# Altium PCB 台灯.PcbDoc
Units mm, origin at the board's own origin, x right, y up, seen from the top; angles counter-clockwise.
Board outline 43.81 x 25.27 mm, 2 copper layers (Top Layer, Bottom Layer); 19 components, 16 nets, 72 pads, 12 vias.
Unrouted connection lines stored in the file: 1.
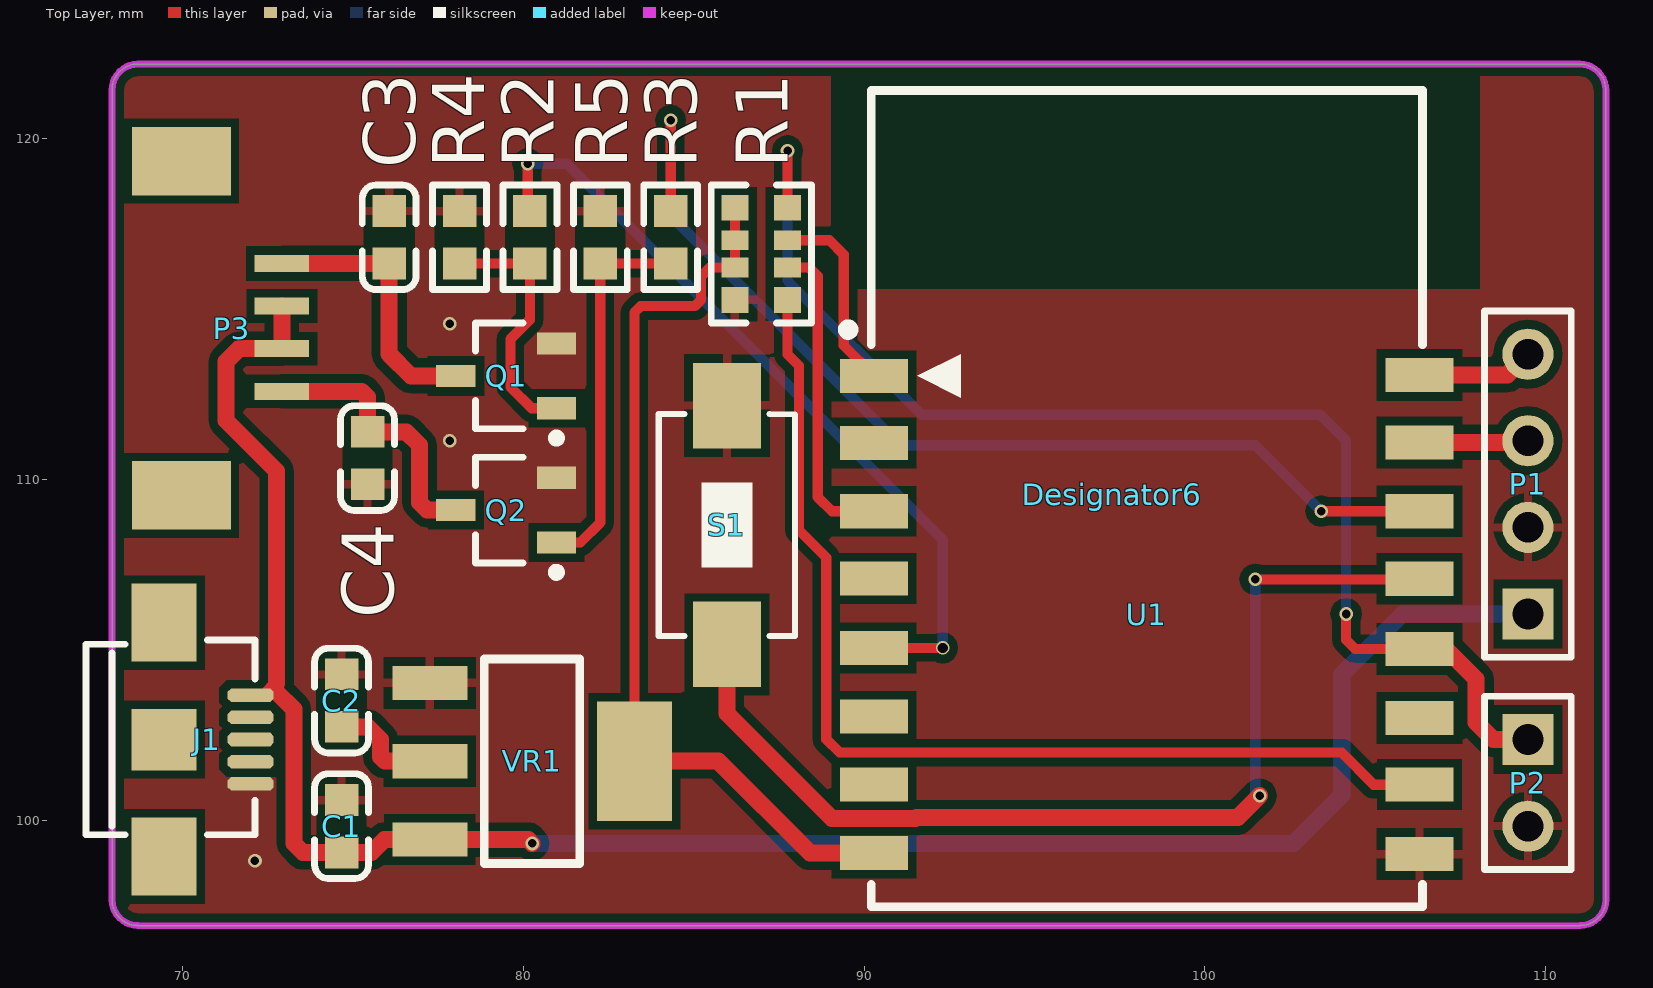
[diagram p0: Top Layer view]
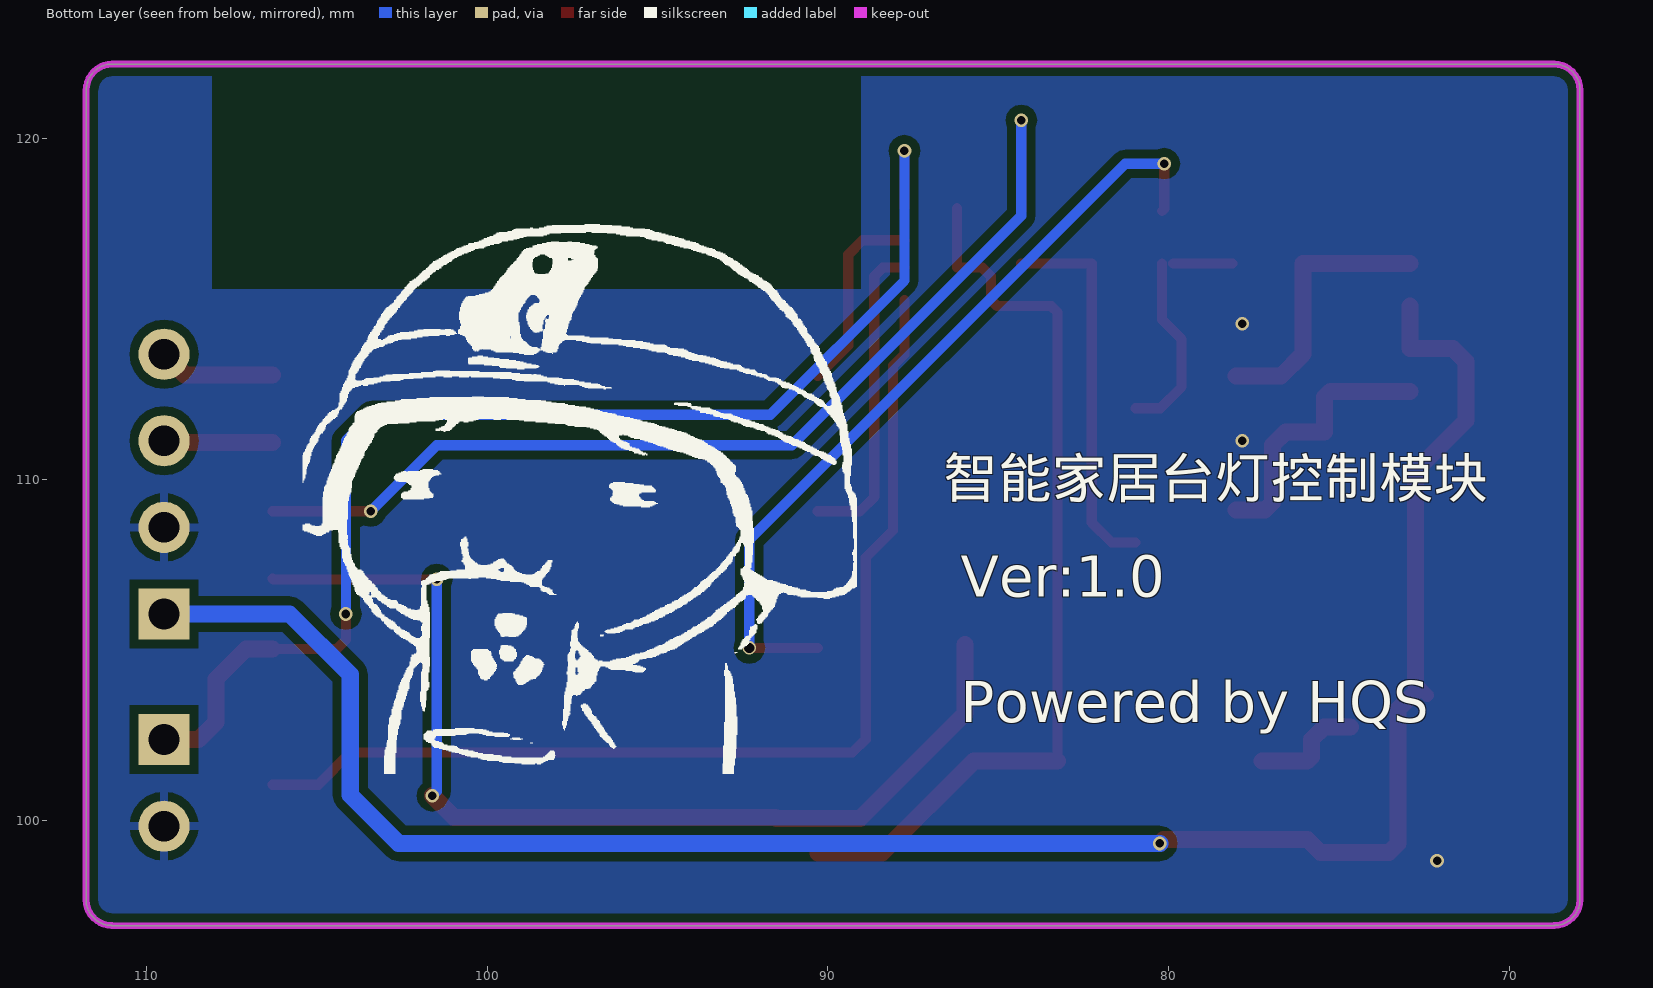
[diagram p1: Bottom Layer view, seen from below]
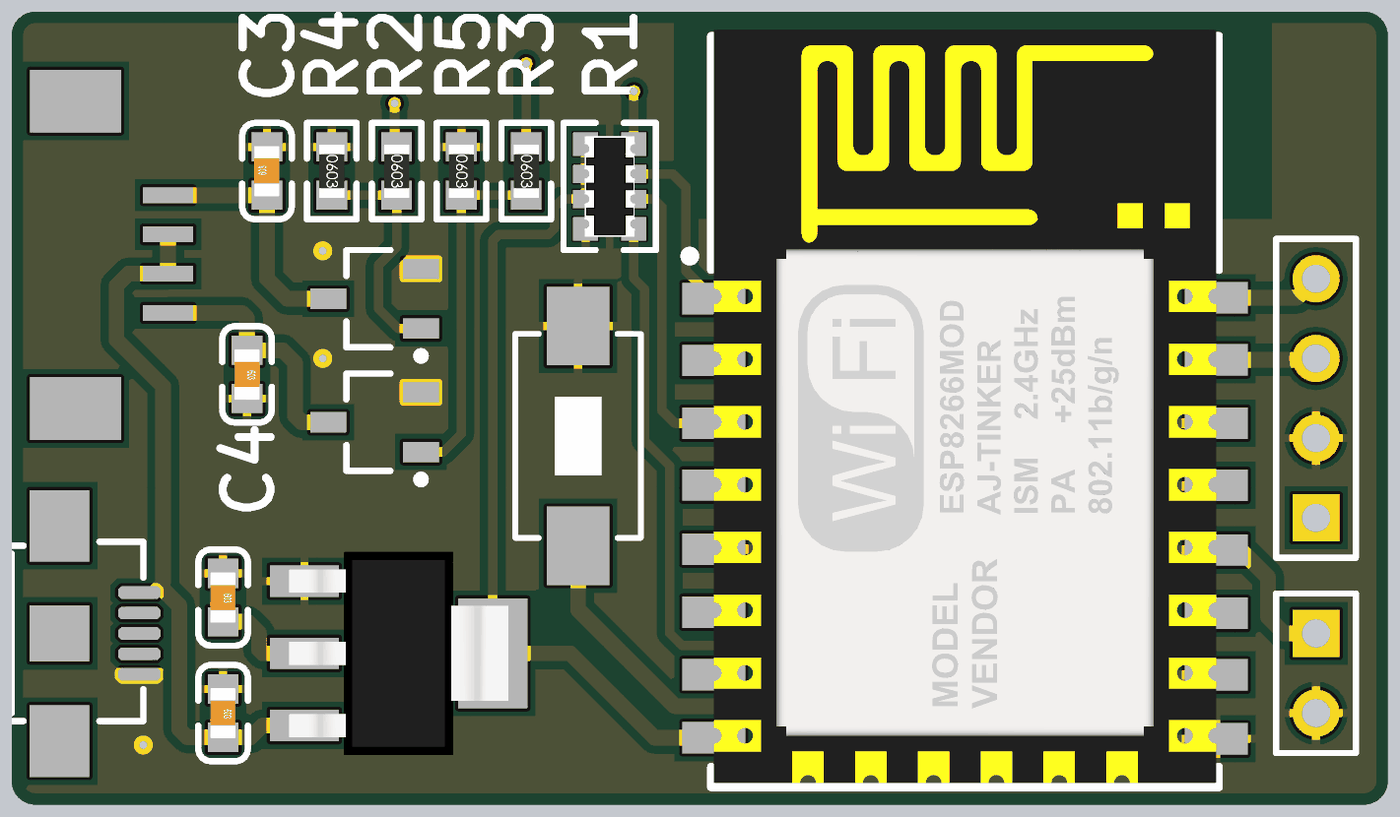
[diagram p2: 3D render of the assembled board from above, using the file's embedded part models]

## Layer stack, top to bottom
Top Solder: solder mask 0.0102, Solder Resist, Dk 3.5
Top Layer: signal copper 0.0356
Dielectric 1: dielectric 0.32, FR-4, Dk 4.8
Bottom Layer: signal copper 0.0356
Bottom Solder: solder mask 0.0102, Solder Resist, Dk 3.5

## Board outline
67.945,97.663 67.945,121.42 cw(c68.699,121.42) 68.699,122.174 111,122.174 cw(c111,121.42) 111.754,121.42 111.76,121.42 111.76,97.663 cw(c111.006,97.663) 111.006,96.909 111.006,96.901 68.699,96.901 68.699,96.909 cw(c68.699,97.663)

## Design rules (kind name [scope] priority, off if disabled: settings)
Clearance [All] p1: gap=0.254 ignorepadtopadclearanceinfootprint=FALSE except(0: Arc-Hole Track-Hole SMDPad-Hole THPad-Hole Via-Hole Fill-Hole Poly-Hole Region-Hole Text-Hole)
PlaneConnect PlaneConnect_1 [All] p1: planeconnectstyle=Relief reliefexpansion=0.508 reliefentries=4 reliefconductorwidth=0.254 reliefairgap=0.254
PolygonConnect PolygonConnect_1 [IsVia] p1: connectstyle=Direct reliefconductorwidth=0.254 reliefentries=4 polygonreliefangle="90 Angle" airgapwidth=0.254
PolygonConnect PolygonConnect_GND [HasFootprint('USB_MICRO')] p2: connectstyle=Direct reliefconductorwidth=0.254 reliefentries=4 polygonreliefangle="90 Angle" airgapwidth=0.254
PolygonConnect PolygonConnect_GND_1 [HasFootprint('LC-SOT-23-3L')] p3: connectstyle=Direct reliefconductorwidth=0.254 reliefentries=4 polygonreliefangle="90 Angle" airgapwidth=0.254
PolygonConnect [All] p4: connectstyle=Relief reliefconductorwidth=0.254 reliefentries=4 polygonreliefangle="90 Angle" airgapwidth=0.254
RoutingVias [All] p1: holewidth=0.711 width=1.27 viastyle="Through Hole" minholewidth=0.711 minwidth=1.27 maxholewidth=0.711 maxwidth=1.27
SolderMaskExpansion [All] p1: expansion=0.102
Width [All] p1: maxlimit=1 minlimit=0.254 preferedwidth=0.254 minimp=50.000000 maximp=50.000000 favimp=50.000000
29 further rules are at their usual default settings.

## Classes and differential pairs
component class Sheet1: C1 C2 C3 C4 J1 P1 P2 P3 Q1 Q2 R1 R2 R3 R4 R5 S1 U1 VR1

## Components (designator, comment, footprint, x,y, rotation, side; value= is the part's Value field where it differs from the comment)
C1 "22uF (226) 20% 6.3V" LC-0603_C 74.676,99.822 r270 top
C2 "22uF (226) 20% 6.3V" LC-0603_C 74.676,103.505 r270 top
C3 "22uF (226) 20% 6.3V" LC-0603_C 76.073,117.094 r90 top
C4 "22uF (226) 20% 6.3V" LC-0603_C 75.438,110.617 r270 top
Designator6 "Comment" PCBComponent_1 97.282,109.563 r0 top
J1 "USB_M" USB_MICRO 69.469,102.362 r270 top locked
P1 "Debug" HDR1X4 109.474,106.045 r90 top
P2 "Boot" HDR1X2 109.474,102.362 r270 top
P3 "LED连接器" 1.25连接器 69.977,114.427 r270 top locked
Q1 "AO3400A N道沟 X0YV1T SOT-23" LC-SOT-23-3L 79.502,113.03 r0 top
Q2 "AO3400A N道沟 X0YV1T SOT-23" LC-SOT-23-3L 79.502,109.093 r0 top
R1 "10KΩ (103) ±5%" LC-0603_Rx4 86.987,116.605 r90 top
R2 "1KΩ (1001) ±1%" LC-0603_R 80.2,117.094 r270 top
R3 "1KΩ (1001) ±1%" LC-0603_R 84.328,117.094 r270 top
R4 "1.5KΩ (1501) ±1%" LC-0603_R 78.137,117.094 r270 top
R5 "1.5KΩ (1501) ±1%" LC-0603_R 82.264,117.094 r270 top
S1 "SW-PB" SW_PB2_A1 85.979,108.712 r180 top locked
U1 "ESP-12" ESP_12 90.297,113.03 r0 top locked
VR1 "AMS1117-3.3" LC-SOT-223 80.264,101.727 r180 top

## Footprints (in the part's own frame and the unit in brackets; to place one, negate y for a bottom-side part, rotate by r counter-clockwise, add the part's x,y. Pads: shape width x height; smd on the part's side, far side on the other; paste and mask are expansions set on the pad)
1.25连接器 [mm]
  rect 2x2.9 smd: 0(-4.9,0) 0(4.9,0)
  rect 0.5x1.6 smd: 1(-1.9,2.95) 2(-0.65,2.95) 3(0.6,2.95) 4(1.85,2.95)
ESP_12 [mm]
  rect 2x1 smd: 1(0,0) 2(0,-1.97) 3(0,-3.97) 4(0,-5.94) 5(0,-7.98) 6(0,-9.99) 7(0,-11.98) 8(0,-13.99) 9(16,-14.03) 10(16,-11.99) 11(16,-10.03) 12(16,-8.01) 13(16,-5.95) 14(16,-3.97) 15(16,-1.95) 16(16,0.03)
  silkscreen extent -0.91,-15.57 16.08,8.37, body extent 0,-15.43 16.01,8.57, height 2.65
HDR1X2 [mm] "Connector; Header; 2 Position"
  rect 1.5x1.5 hole 0.9: 1(0,0)
  round 1.5 hole 0.9: 2(2.54,0)
  silkscreen extent -1.27,-1.27 3.81,1.27
HDR1X4 [mm] "Connector; Header; 4 Position"
  rect 1.5x1.5 hole 0.9: 1(0,0)
  round 1.5 hole 0.9: 2(2.54,0) 3(5.08,0) 4(7.62,0)
  silkscreen extent -1.27,-1.27 8.89,1.27
LC-0603_C [mm]
  rect 0.93x0.98 smd: 1(-0.77,0) 2(0.77,0)
  silkscreen extent -1.53,-0.79 1.54,0.79, body extent -0.8,-0.4 0.8,0.4, height 0.3
LC-0603_R [mm]
  rect 0.93x0.98 smd: 1(-0.77,0) 2(0.77,0)
  silkscreen extent -1.53,-0.79 1.54,0.79, body extent -0.85,-0.4 0.85,0.4, height 0.56
LC-0603_Rx4 [mm]
  rect 0.75x0.8 smd mask+0.051: 1(-1.35,-0.77) 4(1.35,-0.77) 5(1.35,0.77) 8(-1.35,0.77)
  rect 0.58x0.8 smd mask+0.051: 2(-0.4,-0.77) 3(0.4,-0.77) 6(0.4,0.77) 7(-0.4,0.77)
  silkscreen extent -2.02,-1.47 2.02,1.47, body extent -1.6,-0.8 1.6,0.8, height 0.55
LC-SOT-23-3L [mm] "http://www.aosmd.com/res/packaging_information/SOT-23-3L.pdf"
  rect 1.15x0.65 smd: 1(1.475,-0.95) 2(1.475,0.95) 3(-1.475,0)
  silkscreen extent -0.9,-1.95 1.6,1.55, body extent -0.9,-1.55 0.9,1.55, height 1.25
LC-SOT-223 [mm]
  rect 2.2x1 smd: 1(3,-2.3) 2(3,0) 3(3,2.3)
  rect 2.2x3.5 smd: 2(-3,0)
  silkscreen extent -1.4,-3 1.4,3, body extent -3.49,-3.24 3.49,3.24, height 1.64
PCBComponent_1 [mm]
SW_PB2_A1 [mm]
  rect 2x2.5 smd: 1(0,3.556) 2(0,-3.444)
  silkscreen extent -2,-3.19 2,3.31, body extent -2.03,-3.18 2.03,3.3, height 1.2
USB_MICRO [mm] "USB方孔"
  oct 0.4x1.35 smd: 1(-1.3,2.54) 2(-0.65,2.54) 3(0,2.54) 4(0.65,2.54) 5(1.3,2.54)
  rect 2.286x1.9 smd: 6(3.429,0) 7(-3.429,0)
  rect 1.8x1.9 smd: 8(0,0)
  silkscreen extent -2.92,-2.29 2.79,2.67

## Part data
C1 C2 C3 C4: library part "0603 22uF (226) 20% 6.3V", "贴片电容", Package=0603, SuppliersPartNumber=C59461, ComponentLink1Description=供应, ComponentLink1URL=http://www.szlcsc.com/product/details_60514.html, Supplier=LC
J1: "MicroUSB接口"
P1: library part "Header 4", "Header, 4-Pin", LatestRevisionDate=17-Jul-2002, LatestRevisionNote="Re-released for DXP Platform.", Publisher="Altium Limited"
P2: library part "Header 2", "Header, 2-Pin", LatestRevisionDate=17-Jul-2002, LatestRevisionNote="Re-released for DXP Platform.", Publisher="Altium Limited"
P3: library part 1.25mm连接器
Q1 Q2: "MOS(场效应管)", Package=SOT-23, SuppliersPartNumber=C20917, ComponentLink1Description=供应, ComponentLink1URL=http://www.szlcsc.com/product/details_21629.html, Supplier=LC
R1: library part "0603*4  10KΩ (103) 5%", "贴片排阻", Package=0603*4, SuppliersPartNumber=C29718, ComponentLink1Description=供应, ComponentLink1URL=http://www.szlcsc.com/product/details_30472.html, Supplier=LC
R2 R3: library part "0603 1KΩ (1001) 1%", "贴片电阻", Package=0603, SuppliersPartNumber=C21190, ComponentLink1Description=供应, ComponentLink1URL=http://www.szlcsc.com/product/details_21904.html, Supplier=LC
R4 R5: library part "0603 1.5KΩ (1501) 1%", "贴片电阻", Package=0603, SuppliersPartNumber=C22843, ComponentLink1Description=供应, ComponentLink1URL=http://www.szlcsc.com/product/details_23570.html, Supplier=LC
S1: "微动开关", LatestRevisionDate=17-Jul-2002, LatestRevisionNote="Re-released for DXP Platform.", PackageReference=SPST-2, Published=24-Mar-1999, Publisher="Altium Limited"
VR1: library part "SOT-223 AMS1117-3.3", "低压差线性稳压(LDO)", Package=SOT-223, SuppliersPartNumber=C6186, ComponentLink1Description=供应, ComponentLink1URL=http://www.szlcsc.com/product/details_6652.html, Supplier=LC

## Via types
v1: diameter 0.4, hole 0.25, Top Layer to Bottom Layer, 11 vias
v2: diameter 0.4, hole 0.3, Top Layer to Bottom Layer, 1 vias

## Nets (pads, with @x,y where several pads share a name; then routed paths per layer and width w, separated by ;. In a path a pad name is that pad's centre, name@x,y a point inside that pad or via, vN(x,y) a via of type N, cw(c..) or ccw(c..) an arc to the next point about the centre after c; other vN are vias at no path point)
Boot: P2.1 R1.4 U1.12 | length 36.9
  Top Layer w0.3: R1.4 v1(87.757,119.634) ; v1(104.14,106.045) 104.14,105.283 104.403,105.02 U1.12
  Top Layer w0.5: U1.12 107.07,105.02 107.95,104.14 107.95,102.87 108.458,102.362 P2.1
  Bottom Layer w0.3: v1(87.757,119.634) 87.757,115.824 91.694,111.887 103.378,111.887 104.14,111.125 v1(104.14,106.045)
Button_io: S1.1 U1.13 | length 30.4
  Top Layer w0.3: v1(101.473,107.061) 106.278,107.061 U1.13
  Top Layer w0.5: S1.1 85.979,103.124 89.057,100.046 91.506,100.046 91.536,100.076 100.965,100.076 v1(101.604,100.715)
  Bottom Layer w0.3: v1(101.473,107.061) 101.473,100.846 v1(101.604,100.715)
GND: C1.1 C2.1 C3.2 C4.2 J1.5 P1.2 P2.2 Q1.2 Q2.2 R1.8 R4.1 R5.1 S1.2 U1.9 VR1.1
  other v1: 72.136,98.806 77.851,111.125 77.851,114.554
Io15: R1.1 U1.10 | length 31.3
  Top Layer w0.3: R1.1 87.757,113.665 88.092,113.33 88.092,108.504 88.893,107.703 88.893,102.373 89.285,101.981 104.013,101.981 104.954,101.04 U1.10
LED_Warm: R2.1 U1.5 | length 23.3
  Top Layer w0.3: v1(80.137,119.253) 80.137,117.928 R2.1 ; U1.5 v2(92.308,105.05)
  Bottom Layer w0.3: v1(80.137,119.253) 81.28,119.253 92.308,108.225 v2(92.308,105.05)
LED_White: R3.1 U1.14 | length 31
  Top Layer w0.3: R3.1 v1(84.328,120.523) ; v1(103.411,109.06) U1.14
  Bottom Layer w0.3: v1(84.328,120.523) 84.328,117.729 91.059,110.998 101.473,110.998 v1(103.411,109.06)
NetQ1_1: Q1.1 R2.2 R4.2 | length 7.2
  Top Layer w0.3: R4.2 R2.2@79.883,116.324 ; R2.2 80.2,114.675 79.629,114.103 79.629,112.704 80.253,112.08 Q1.1
NetQ2_1: Q2.1 R3.2 R5.2 | length 11.2
  Top Layer w0.3: Q2.1 81.681,108.143 82.264,108.726 R5.2 R3.2
NetR1_3: R1.2 U1.3 | length 9.3
  Top Layer w0.3: R1.2 88.392,116.205 88.646,115.951 88.646,109.474 89.06,109.06 U1.3
NetR1_4: R1.3 U1.1 | length 5.7
  Top Layer w0.3: R1.3 88.989,117.005 89.408,116.586 89.408,113.919 U1.1
RX: P1.3 U1.15 | length 3.2
  Top Layer w0.5: U1.15 109.429,111.08 P1.3
TX: P1.4 U1.16 | length 3.4
  Top Layer w0.5: U1.16 108.869,113.06 P1.4
VCC: C2.2 R1.5 R1.6 R1.7 U1.8 VR1.2 | length 30.3
  Top Layer w0.3: VR1.2@83.264,101.727 83.264,114.887 83.454,115.077 85.039,115.077 85.222,115.26 85.222,115.951 85.476,116.205 R1.7 R1.6 R1.5
  Top Layer w0.5: C2.2 75.446,102.735 75.819,102.362 75.819,101.854 75.946,101.727 VR1.2@77.264,101.727 ; VR1.2@83.264,101.727 85.725,101.727 88.412,99.04 U1.8
Vcc_5v: C1.2 J1.1 P1.1 P3.2 P3.3 VR1.3 | length 59.6
  Top Layer w0.4: J1.1@72.42,103.662 72.771,104.013
  Top Layer w0.5: 72.771,103.759 73.279,103.251 73.279,99.314 73.541,99.052 C1.2 75.557,99.052 75.932,99.427 VR1.3 80.151,99.427 v1(80.264,99.314) ; 72.771,104.013 72.771,110.236 71.282,111.725 71.282,113.446 71.663,113.827 P3.3 P3.2
  Bottom Layer w0.5: v1(80.264,99.314) 102.592,99.314 104.013,100.735 104.013,104.267 105.791,106.045 P1.1
Warm_OUT: C3.1 P3.1 Q1.3 | length 8
  Top Layer w0.5: P3.1 76.07,116.327 C3.1 76.073,113.665 76.708,113.03 Q1.3
White_OUT: C4.1 P3.4 Q2.3 | length 8.1
  Top Layer w0.5: P3.4 75.264,112.577 75.438,112.403 C4.1 76.573,111.387 76.962,110.998 76.962,109.314 77.183,109.093 Q2.3
pads on no net: J1.2 J1.3 J1.4 J1.6 J1.7 J1.8 P3.0 U1.2 U1.4 U1.6 U1.7 U1.11

## Polygon pours and split planes (outlines as drawn)
GND on Top Layer (solid, remove dead copper, pour order 58): 65.024,124.333 65.024,93.98 116.459,93.98 116.459,124.206
GND on Bottom Layer (solid, remove dead copper, pour order 60): 64.643,124.841 64.008,124.206 64.008,95.377 116.967,95.377 117.221,95.631 115.824,97.028 115.824,124.841

## Keep-outs
Keep-Out Layer:
  lines w0.2: 68.699,96.901 111.006,96.901 ; 68.699,96.909 cw(c68.699,97.663) 67.945,97.663 67.945,121.42 cw(c68.699,121.42) 68.699,122.174 111,122.174 cw(c111,121.42) 111.754,121.42 ; 111.006,96.909 ccw(c111.006,97.663) 111.76,97.663 111.76,121.42

## Other copper
Top Layer:
  pour cut-out: 89.027,115.57 108.077,115.57 108.077,122.174 89.027,122.174
Bottom Layer:
  pour cut-out: 89.027,122.174 89.027,115.57 108.077,115.57 108.077,122.174

## Silkscreen, mask and mechanical layers (free items; w line width, h text height)
Bottom Overlay:
  text "智能家居台灯控制模块" at 86.614,109.093 h2
  text "Ver:1.0" at 86.106,106.553 h1.2
  text "Powered by HQS" at 86.106,102.87 h1.2

## Text inside footprints (layer, text, board x,y; h text height)
U1: Mechanical 13 "CUTOUT POLYGON" at 90.424,120.396 h0.25; Mechanical 13 "ANTENNA AREA" at 90.424,120.904 h0.25